# EAGLE board Tarjeta5 (EAGLE 7.6.0)
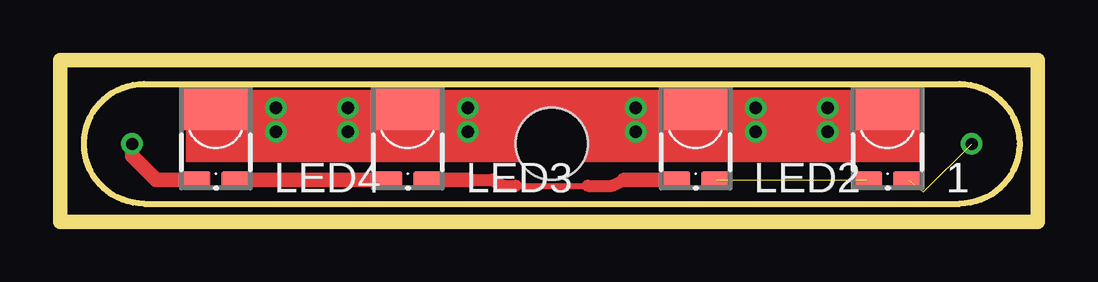
[diagram p0: board, top side]
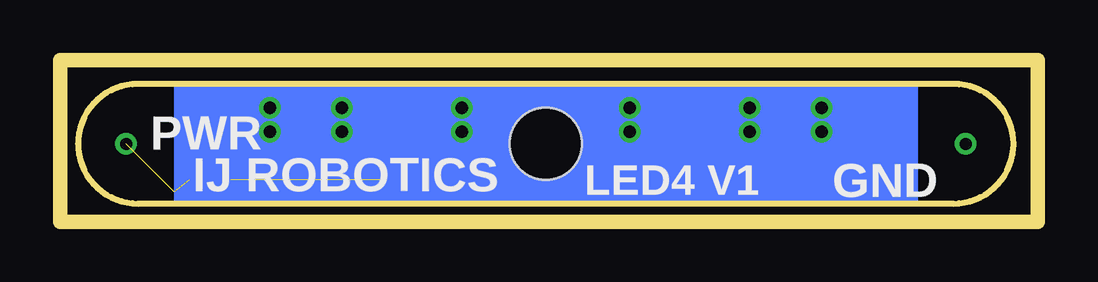
[diagram p1: board, bottom side, seen from below]

Size 40.75 x 6.75 mm. Coordinates in mm from the lower left corner, seen from the top.
Outline: 3.5,5.75 37.5,5.75 arc-90 40,3.25 arc-90 37.5,0.75 3.5,0.75 arc-90 1,3.25 arc-90 3.5,5.75
Outline: 0,0.75 0,1.25 0,6.75 40.75,6.75 40.75,0 0,0 0,0.75
Copper layers (1*16): Top 0.035mm / dielectric 0.204mm / Bottom 0.035mm
Design rules "default *": minimum track width 10mil, minimum drill 24mil, track to track 8mil, track to pad 8mil, pad to pad 8mil, via to via 8mil, smd to smd 8mil, copper to edge 40mil, drill to drill 8mil, minimum pad ring 10mil, minimum via ring 8mil, stop-mask expansion 4mil, vias tented up to drill 0mil, thermal gap 10mil
Holes 3 mm at 20.5,3.25

## Footprints (pad centres in the part's own frame; a part is rotated, then mirrored left to right if it is on the bottom)
CINVESTAV_LUXEON = smd 1.26 x 0.73: A 0.87,-2.51; C -0.87,-2.51 | smd 2.86 x 1.83: TH 0.01,0.49

## Placement (x,y rotation side)
1  LED_VUG  [CINVESTAV_LUXEON]  34.5,4.25 0 top
LED2  LED_VUG  [CINVESTAV_LUXEON]  26.5,4.25 0 top
LED3  LED_VUG  [CINVESTAV_LUXEON]  14.5,4.25 0 top
LED4  LED_VUG  [CINVESTAV_LUXEON]  6.5,4.25 0 top

## Library data of the parts
1 LED2-LED4 = led_lumiled

## Nets
GROUND: LED4.C
N$5: 1.C LED2.A
N$6: LED2.C LED3.A
N$7: LED3.C LED4.A
POWER: 1.A

## Tracks (layer width: path | path; a pad name or v marks a point on that pad's centre or on a via)
GROUND  (via drill 0.5 pad 0.36)
  Top 0.61: v3,3.25 3,2.75 4,1.75 LED4.C
N$4  (via drill 0.51)
  other vias: 9,3.75
N$5  (1 unrouted)
N$6
  Top 0.25: 19,1.5 22,1.5
  Top 0.5: 17,1.75 18,1.75 18.5,1.5 19,1.5 | 22,1.5 23,1.5 23.5,1.75
  Top 0.61: LED3.A 16.99,1.74 17,1.75 | 23.5,1.75 LED2.C
N$7
  Top 0.61: LED4.A 12.99,1.74 13,1.75 LED3.C
N$8  (via drill 0.51)
  other vias: 9,4.75
N$9  (via drill 0.51)
  other vias: 12,4.75
N$10  (via drill 0.51)
  other vias: 12,3.75
N$11  (via drill 0.51)
  other vias: 17,3.75
N$12  (via drill 0.51)
  other vias: 17,4.75
N$13  (via drill 0.51)
  other vias: 24,4.75
N$14  (via drill 0.51)
  other vias: 24,3.75
N$15  (via drill 0.51)
  other vias: 29,3.75
N$16  (via drill 0.51)
  other vias: 29,4.75
N$17  (via drill 0.51)
  other vias: 32,4.75
N$18  (via drill 0.51)
  other vias: 32,3.75
POWER  (via drill 0.5 pad 0.64)  (2 unrouted)
  other vias: 38,3.25
(copper drawn outside any net)
  shapes: Bottom area x2, Top area x2

## Text on the board
bNames: PWR | GND | IJ ROBOTICS | LED4 V1